# Altium PCB PCIEx1toMXM3.0.PcbDoc
Units mm, origin at the board's own origin, x right, y up, seen from the top; angles counter-clockwise.
Board outline 100 x 97.65 mm, 2 copper layers (F.Cu, B.Cu); 34 components, 205 nets, 419 pads, 135 vias.
Unrouted connection lines stored in the file: 17.
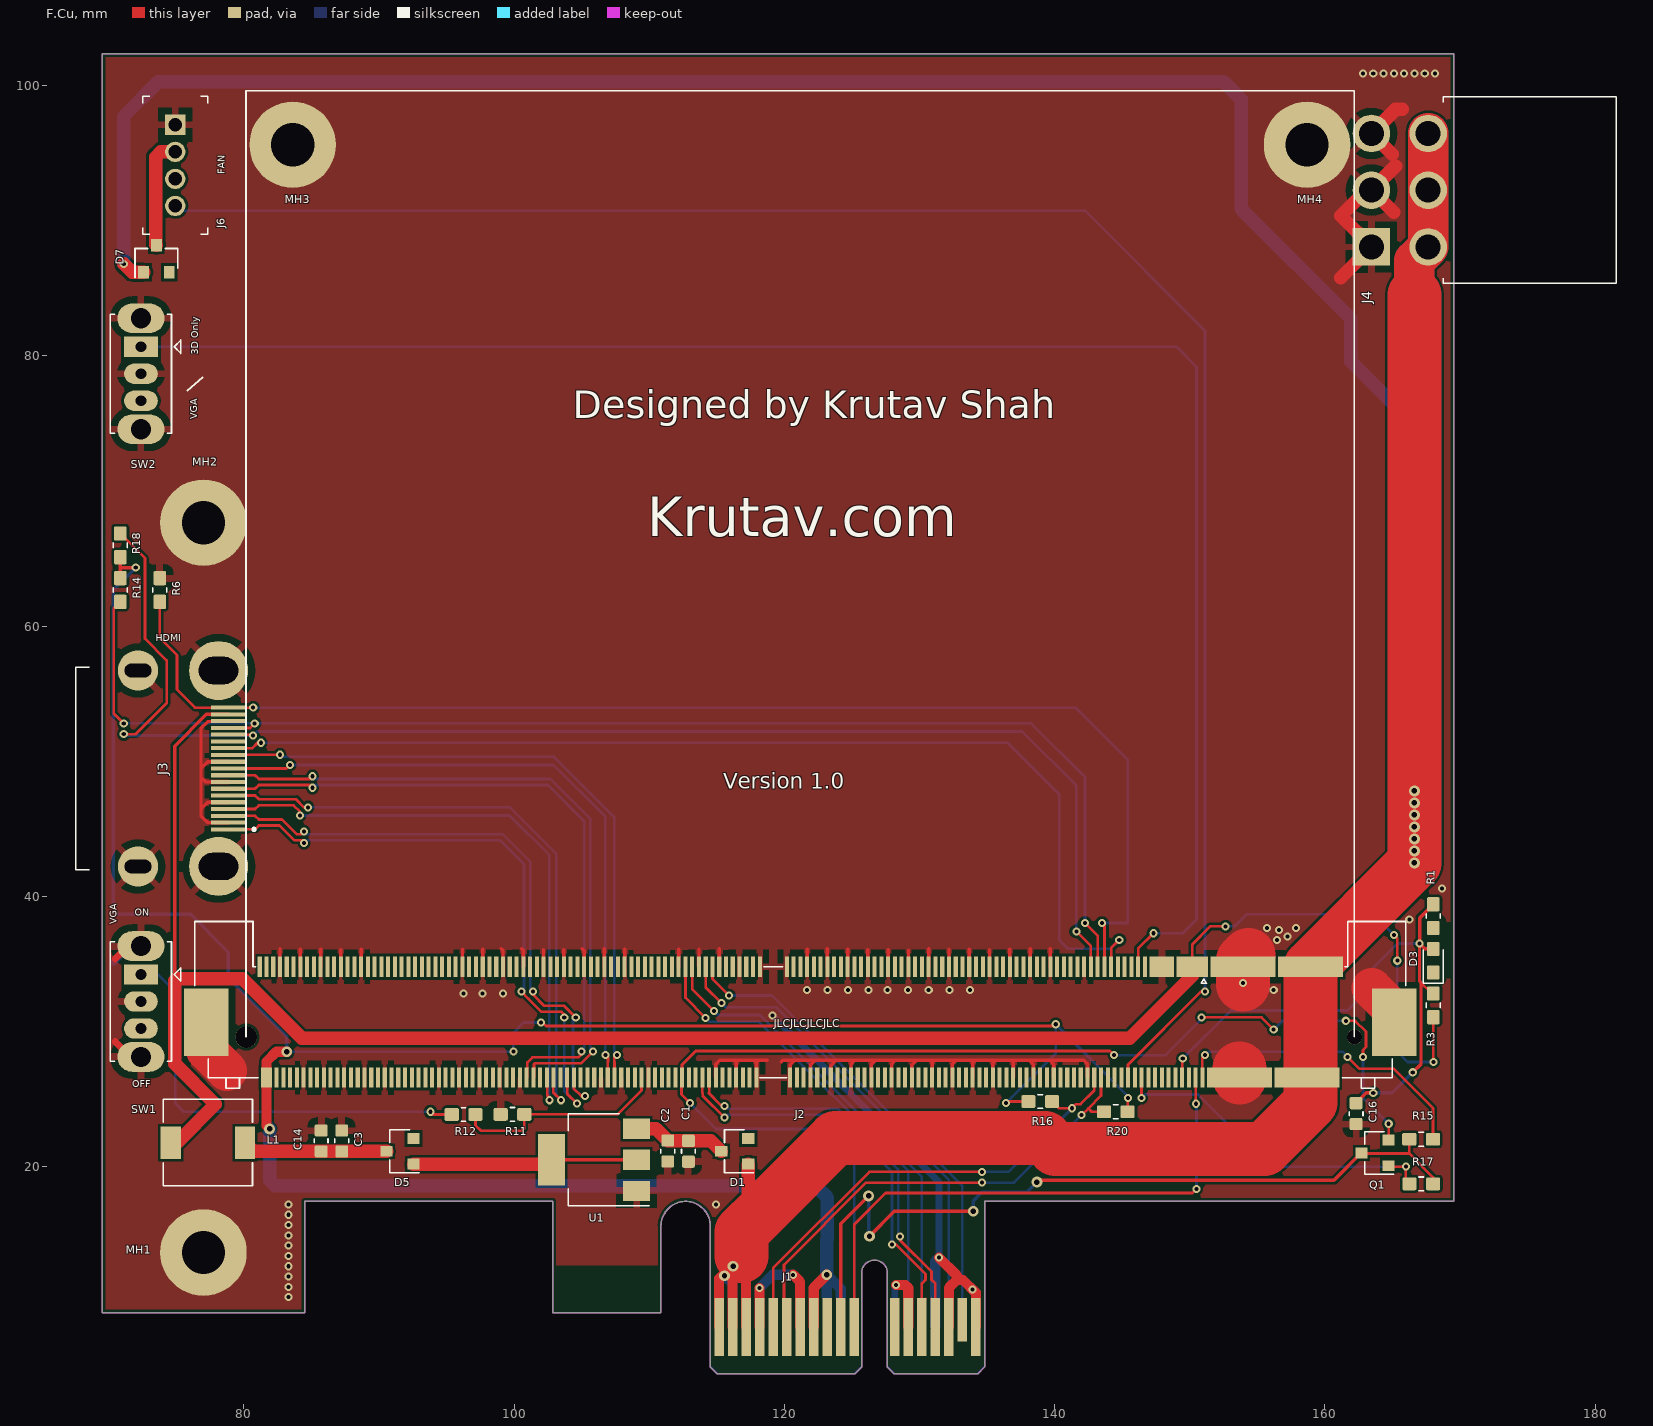
[diagram p0: F.Cu view]
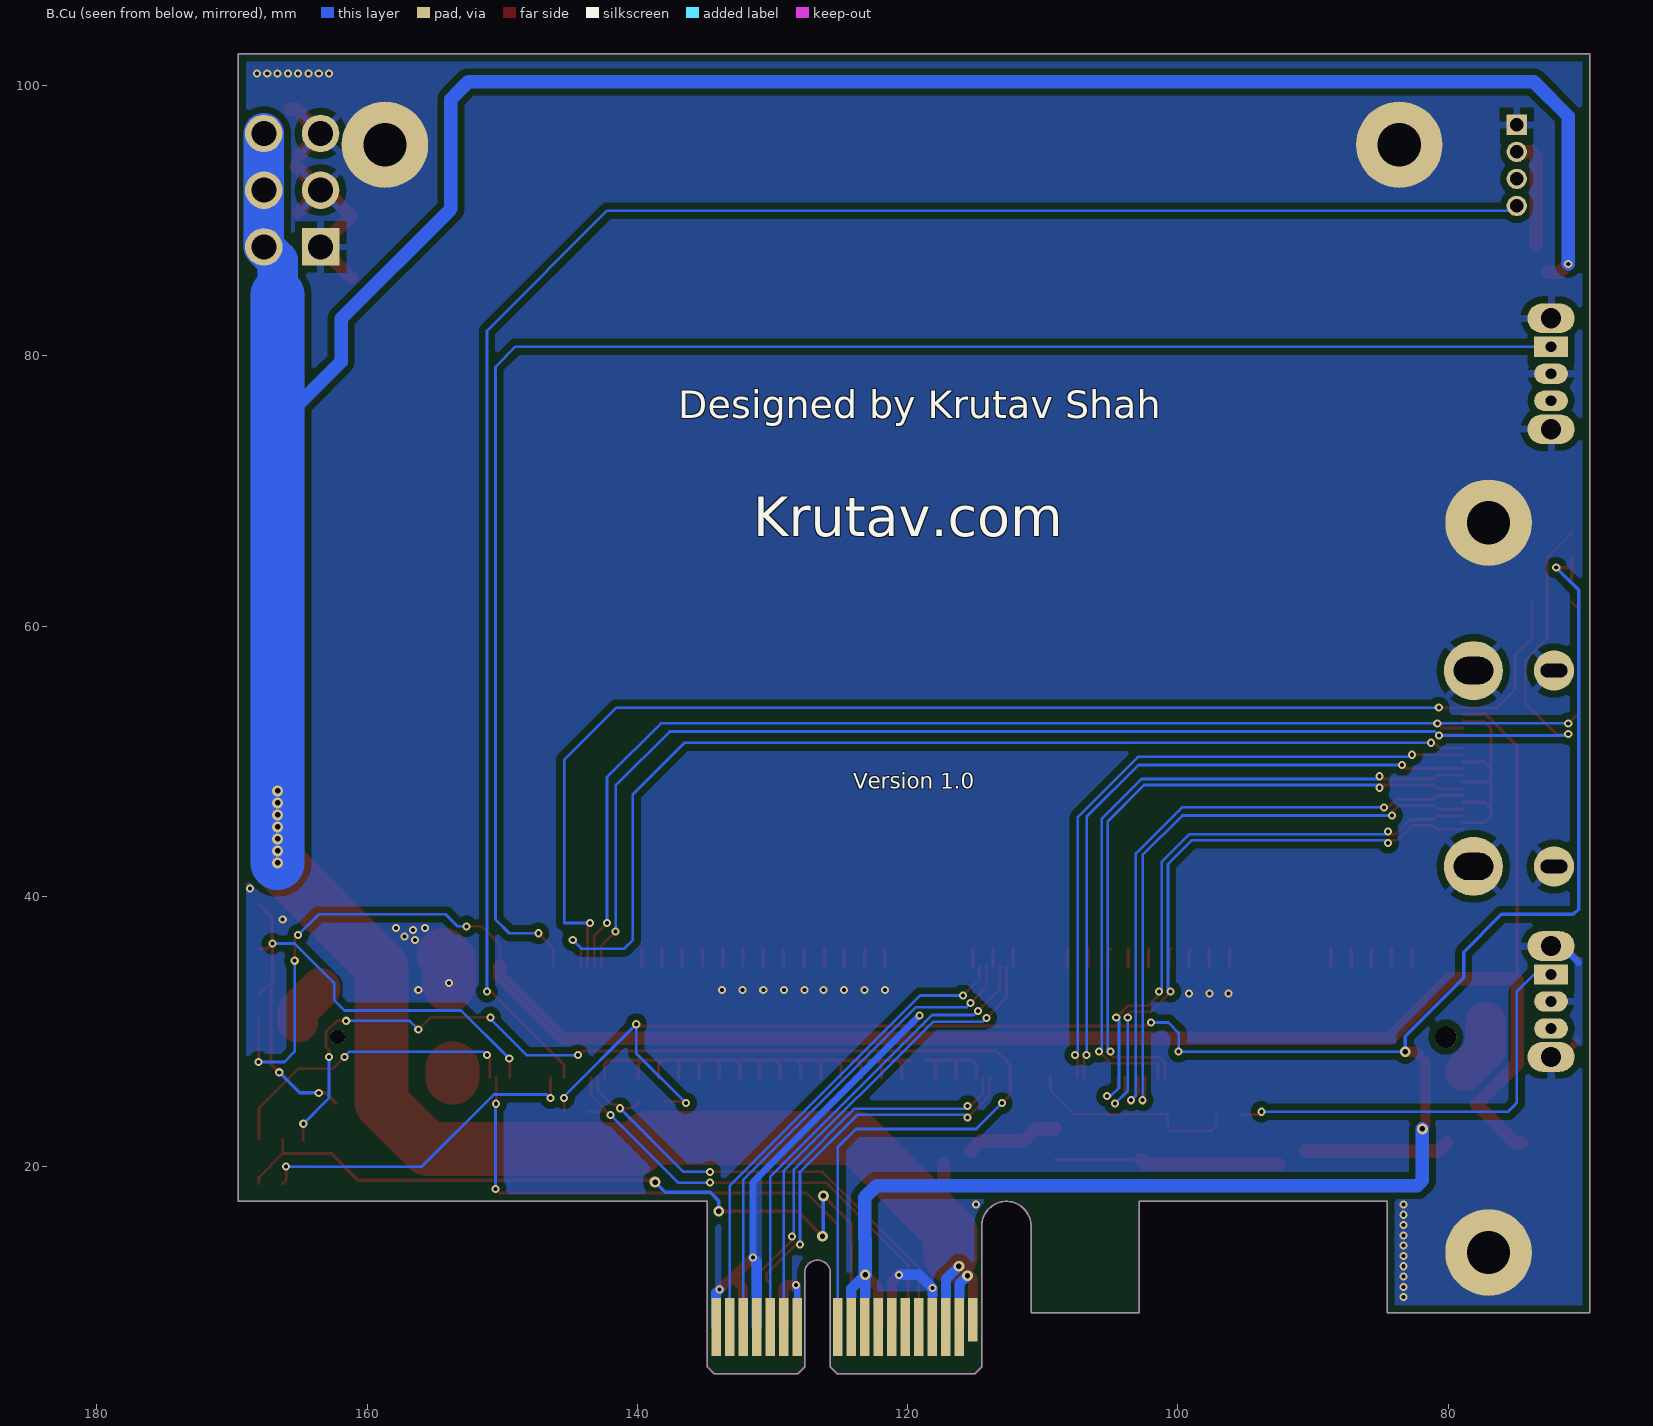
[diagram p1: B.Cu view, seen from below]

## Layer stack, top to bottom
F.Mask: solder mask 0.0102, Solder Resist, Dk 3.5
F.Cu: signal copper 0.0356
Dielectric 1: dielectric 0.32, FR-4, Dk 4.8
B.Cu: signal copper 0.0356
B.Mask: solder mask 0.0102, Solder Resist, Dk 3.5

## Board outline
169.52,17.428 169.52,102.328 69.52,102.328 69.52,9.178 84.52,9.178 84.52,17.428 102.87,17.428 102.87,9.178 110.87,9.178 110.87,15.603 cw(c112.695,15.603) 114.52,15.603 114.521,13.077 114.521,5.177 115.021,4.677 125.221,4.677 125.721,5.177 125.721,12.127 cw(c126.671,12.127) 127.621,12.127 127.621,5.177 128.121,4.677 134.321,4.677 134.821,5.177 134.821,13.077 134.822,17.428 169.52,17.428

## Design rules (kind name [scope] priority, off if disabled: settings)
Clearance "Clearence 0.508_Polygon" [InNamedPolygon('B.Cu-GND')] p1: gap=0.508 ignorepadtopadclearanceinfootprint=FALSE
Clearance "Clearence 0.2_NetClass" [InNetClass('Default')] p2: gap=0.2 ignorepadtopadclearanceinfootprint=FALSE
Clearance "Clearence 0.1_Polygon" [InNamedPolygon('F.Cu-GND')] p3: gap=0.1 ignorepadtopadclearanceinfootprint=FALSE
HoleSize "Hole Size (Default)" [All] p1: absolutevalues=TRUE maxlimit=10 minlimit=0 maxpercent=80.000 minpercent=20.000
MinimumSolderMaskSliver [All] p1: minsoldermaskwidth=0
PolygonConnect Polygon_F.Cu-GND_ConnectDirect [IsNamedPolygon('F.Cu-GND') vs IsVia] p1: connectstyle=Direct reliefconductorwidth=0.254 reliefentries=4 polygonreliefangle="90 Angle" airgapwidth=0.254
PolygonConnect Polygon_F.Cu-GND_ConnectRelief45 [IsNamedPolygon('F.Cu-GND') vs (IsThruPin or IsSMTPin) and (PadShape_AllLayers = 'Round')] p2: connectstyle=Relief reliefconductorwidth=0.508 reliefentries=4 polygonreliefangle="45 Angle" airgapwidth=0.508
PolygonConnect Polygon_F.Cu-GND_ConnectRelief90 [IsNamedPolygon('F.Cu-GND') vs (IsThruPin or IsSMTPin) and (PadShape_AllLayers <> 'Round')] p3: connectstyle=Relief reliefconductorwidth=0.508 reliefentries=4 polygonreliefangle="90 Angle" airgapwidth=0.508
PolygonConnect Polygon_B.Cu-GND_ConnectDirect [IsNamedPolygon('B.Cu-GND') vs IsVia] p4: connectstyle=Direct reliefconductorwidth=0.254 reliefentries=4 polygonreliefangle="90 Angle" airgapwidth=0.254
PolygonConnect Polygon_B.Cu-GND_ConnectRelief45 [IsNamedPolygon('B.Cu-GND') vs (IsThruPin or IsSMTPin) and (PadShape_AllLayers = 'Round')] p5: connectstyle=Relief reliefconductorwidth=0.508 reliefentries=4 polygonreliefangle="45 Angle" airgapwidth=0.508
PolygonConnect Polygon_B.Cu-GND_ConnectRelief90 [IsNamedPolygon('B.Cu-GND') vs (IsThruPin or IsSMTPin) and (PadShape_AllLayers <> 'Round')] p6: connectstyle=Relief reliefconductorwidth=0.508 reliefentries=4 polygonreliefangle="90 Angle" airgapwidth=0.508
RoutingVias [All] p1: holewidth=0.711 width=1.27 viastyle="Through Hole" minholewidth=0.711 minwidth=1.27 maxholewidth=0.711 maxwidth=1.27
SilkToSilkClearance [All] p1: silktosilkclearance=0
SilkToSolderMaskClearance [IsPad] p1: minsilkscreentomaskgap=0 clearancetoexposedcopper=TRUE
SolderMaskExpansion [All] p1: expansion=0.102 istentingtop=FALSE
Width [All] p1: maxlimit=10 minlimit=0.2 preferedwidth=0.25 minimp=50.000000 maximp=50.000000 favimp=50.000000
26 further rules are at their usual default settings.

## Classes and differential pairs
net class Default: +3.3VA +3V3 +5V +12V CEC CK_N CK_P D0_N D0_P D1_N D1_P D2_N D2_P DP_A_HPD DP_D_AUX DP_D_AUX# DP_D_HPD DP_D_L3 DP_D_L3# Enable GND Net-(C1-Pad1) Net-(C4-Pad1) Net-(C5-Pad1) Net-(C6-Pad1) Net-(C7-Pad1) Net-(C8-Pad1) Net-(C9-Pad1) Net-(C10-Pad1) Net-(C11-Pad1) Net-(C12-Pad1) Net-(C13-Pad1) Net-(C14-Pad2) Net-(D5-Pad2) Net-(D7-Pad1) Net-(FB1-Pad1) Net-(FB2-Pad1) Net-(FB3-Pad1) Net-(FB4-Pad1) Net-(FB5-Pad2) Net-(J1-PadA1) Net-(J1-PadA5) Net-(J1-PadA6) Net-(J1-PadA7) Net-(J1-PadA8) Net-(J1-PadB9) Net-(J1-PadB12) Net-(J2-Pad6) Net-(J2-Pad10) Net-(J2-Pad12) Net-(J2-Pad14) Net-(J2-Pad16) Net-(J2-Pad18) Net-(J2-Pad19) Net-(J2-Pad22) Net-(J2-Pad23) Net-(J2-Pad25) Net-(J2-Pad26) Net-(J2-Pad27) Net-(J2-Pad28) Net-(J2-Pad30) Net-(J2-Pad38) Net-(J2-Pad39) Net-(J2-Pad40) Net-(J2-Pad41) Net-(J2-Pad42) Net-(J2-Pad43) Net-(J2-Pad44) Net-(J2-Pad45) Net-(J2-Pad154) Net-(J2-Pad158) Net-(J2-Pad159) Net-(J2-Pad160) Net-(J2-Pad161) Net-(J2-Pad163) Net-(J2-Pad165) Net-(J2-Pad167) Net-(J2-Pad169) Net-(J2-Pad171) Net-(J2-Pad175) Net-(J2-Pad177) Net-(J2-Pad181) Net-(J2-Pad182) Net-(J2-Pad183) Net-(J2-Pad184) Net-(J2-Pad187) Net-(J2-Pad189) Net-(J2-Pad193) Net-(J2-Pad195) Net-(J2-Pad199) Net-(J2-Pad201) Net-(J2-Pad205) Net-(J2-Pad207) Net-(J2-Pad211) Net-(J2-Pad213) Net-(J2-Pad217) Net-(J2-Pad219) Net-(J2-Pad223) Net-(J2-Pad225) Net-(J2-Pad227) Net-(J2-Pad229) Net-(J2-Pad231) Net-(J2-Pad233) Net-(J2-Pad234) Net-(J2-Pad235) Net-(J2-Pad237) Net-(J2-Pad238) Net-(J2-Pad239) Net-(J2-Pad240) Net-(J2-Pad241) Net-(J2-Pad242) Net-(J2-Pad243) Net-(J2-Pad245) Net-(J2-Pad246) Net-(J2-Pad247) Net-(J2-Pad248) Net-(J2-Pad249) Net-(J2-Pad252) Net-(J2-Pad254) Net-(J2-Pad258) Net-(J2-Pad260) Net-(J2-Pad264) Net-(J2-Pad266) Net-(J2-Pad270) Net-(J2-Pad272) Net-(J2-Pad274) Net-(J2-Pad281) Net-(J3-Pad14) PER0_N PER0_P PER1_N PER1_P PER2_N PER2_P PER3_N PER3_P PER4_N PER4_P PER5_N PER5_P PER6_N PER6_P PER7_N PER7_P PER8_N PER8_P PER9_N PER9_P PER10_N PER10_P PER11_N PER11_P PER12_N PER12_P PER13_N PER13_P PER14_N PER14_P PER15_N PER15_P PERST PET0_N PET0_P PET1_N PET1_P PET2_N PET2_P PET3_N PET3_P PET4_N PET4_P PET5_N PET5_P PET6_N PET6_P PET7_N PET7_P PET8_N PET8_P PET9_N PET9_P PET10_N PET10_P PET11_N PET11_P PET12_N PET12_P PET13_N PET13_P PET14_N PET14_P PET15_N PET15_P PRSNT_R# REFCLK_N REFCLK_P SMCLK SMDAT TH_OVERT# TH_PWM TMDS_HPD TMDS_SCL TMDS_SDA VGA_DISABLE# WAKE

## Components (designator, comment, footprint, x,y, rotation, side; value= is the part's Value field where it differs from the comment)
C1 "C_0603_1608Metric" C_0603_1608Metric 112.903,21.137 r270 top
C2 "C_0603_1608Metric" C_0603_1608Metric 111.379,21.15 r270 top
C3 "C_0603_1608Metric" C_0603_1608Metric 87.249,21.899 r270 top
C14 "C_0603_1608Metric" C_0603_1608Metric 85.725,21.899 r270 top
C16 "C_0603_1608Metric" C_0603_1608Metric 162.306,23.918 r270 top
D1 "PMEG4010ET" D_SOT-23_ANK 116.332,21.137 r180 top
D3 "LED_0603_1608Metric_Pad1.05x0.95mm_HandSolder" LED_0603_1608Metric_Pad1.05x0.95mm_HandSolder 168.021,35.234 r90 top
D5 "PMEG4010ET" D_SOT-23_ANK 91.567,21.137 r180 top
D7 "PMEG4010ET" D_SOT-23_ANK 73.533,87.177 r90 top
J1 "Bus_PCI_Express_x1" BUS_PCIexpress_x1 115.171,8.127 r0 top
J2 "MXM3.0" JAE_MM70-314-310B1 121.183,30.688 r180 top
J3 "208658-1081" 2086581081 73.66,49.458 r270 top
J4 "45558-0003" 455580003 167.64,96.448 r270 top
J6 "PinHeader_1x4_P2mm_Drill1mm" PinHeader_1x4_P2mm_Drill1mm 74.93,97.083 r270 top
L1 "L_6.3x6.3_H3" L_6.3x6.3_H3 77.343,21.772 r0 top
MH1 "MountingHole_3.2mm_M3_Pad" MountingHole_3.2mm_M3_Pad 77.02,13.644 r0 top
MH2 "MountingHole_3.2mm_M3_Pad" MountingHole_3.2mm_M3_Pad 77.02,67.644 r0 top
MH3 "MountingHole_3.2mm_M3_Pad" MountingHole_3.2mm_M3_Pad 83.617,95.61 r90 top
MH4 "MountingHole_3.2mm_M3_Pad" MountingHole_3.2mm_M3_Pad 158.674,95.61 r90 top
Q1 "BC848" SOT-23 163.703,21.01 r180 top
R1 "R_0603_1608Metric_Pad1.05x0.95mm_HandSolder" R_0603_1608Metric_Pad1.05x0.95mm_HandSolder 168.021,38.536 r90 top
R3 "R_0603_1608Metric_Pad1.05x0.95mm_HandSolder" R_0603_1608Metric_Pad1.05x0.95mm_HandSolder 168.021,31.932 r90 top
R6 "R_0603_1608Metric_Pad1.05x0.95mm_HandSolder" R_0603_1608Metric_Pad1.05x0.95mm_HandSolder 73.787,62.666 r270 top
R11 "R_0603_1608Metric_Pad1.05x0.95mm_HandSolder" R_0603_1608Metric_Pad1.05x0.95mm_HandSolder 99.885,23.868 r0 top
R12 "R_0603_1608Metric_Pad1.05x0.95mm_HandSolder" R_0603_1608Metric_Pad1.05x0.95mm_HandSolder 96.266,23.855 r180 top
R14 "R_0603_1608Metric_Pad1.05x0.95mm_HandSolder" R_0603_1608Metric_Pad1.05x0.95mm_HandSolder 70.866,62.666 r270 top
R15 "R_0603_1608Metric_Pad1.05x0.95mm_HandSolder" R_0603_1608Metric_Pad1.05x0.95mm_HandSolder 167.118,22.026 r180 top
R16 "R_0603_1608Metric_Pad1.05x0.95mm_HandSolder" R_0603_1608Metric_Pad1.05x0.95mm_HandSolder 138.938,24.82 r0 top
R17 "R_0603_1608Metric_Pad1.05x0.95mm_HandSolder" R_0603_1608Metric_Pad1.05x0.95mm_HandSolder 167.132,18.724 r0 top
R18 "R_0603_1608Metric_Pad1.05x0.95mm_HandSolder" R_0603_1608Metric_Pad1.05x0.95mm_HandSolder 70.866,65.968 r270 top
R20 "R_0603_1608Metric_Pad1.05x0.95mm_HandSolder" R_0603_1608Metric_Pad1.05x0.95mm_HandSolder 144.526,24.058 r0 top
SW1 "SW_Slide_1P2T_CK_OS102011MS2Q" SW_Slide_1P2T_CK_OS102011MS2Q#1 72.39,34.218 r270 top
SW2 "SW_Slide_1P2T_CK_OS102011MS2Q" SW_Slide_1P2T_CK_OS102011MS2Q#2 72.39,80.668 r270 top
U1 "AMS1117-5.0" SOT-223-3_TabPin2 105.918,20.502 r180 top

## Footprints (in the part's own frame and the unit in brackets; to place one, negate y for a bottom-side part, rotate by r counter-clockwise, add the part's x,y. Pads: shape width x height; smd on the part's side, far side on the other; paste and mask are expansions set on the pad)
455580003 [mm]
  round 2.775 hole 1.85 paste-2.775 mask+0.05: 1(0,0) 2(4.2,0) 3(8.4,0) 4(0,-4.2) 5(4.2,-4.2)
  rect 2.775x2.775 hole 1.85 paste-2.775 mask+0.05: 6(8.4,-4.2)
  oval 3.05x0 hole 3.05 paste-3.05 mask+0.05: MH1(0,7.3) MH2(8.4,7.3)
  silkscreen extent -2.7,1.1 11.1,13.9
2086581081 [mm]
  rect 0.3x2.6 smd mask+0.05: 1(4.5,5.235) 2(4,5.235) 3(3.5,5.235) 4(3,5.235) 5(2.5,5.235) 6(2,5.235) 7(1.5,5.235) 8(1,5.235) 9(0.5,5.235) 10(0,5.235) 11(-0.5,5.235) 12(-1,5.235) 13(-1.5,5.235) 14(-2,5.235) 15(-2.5,5.235) 16(-3,5.235) 17(-3.5,5.235) 18(-4,5.235) 19(-4.5,5.235)
  round 4.365 hole 2.91 slot 2 at 0 deg paste-4.365 mask+0.05: MH1(-7.25,4.475) MH2(7.25,4.475)
  round 2.985 hole 1.99 slot 1 at 0 deg paste-2.985 mask-2.985: MH3(-7.25,-1.485)
  round 2.985 hole 1.99 slot 1 at 0 deg paste-2.985 mask+0.05: MH4(7.25,-1.485)
  silkscreen extent -7.5,-6.07 7.5,7.2
BUS_PCIexpress_x1 [mm]
  rect 0.7x3.2 smd far side paste-3.2 mask+0.05: A1(0,0.55)
  rect 0.7x4.3 smd far side paste-4.3 mask+0.05: A2(1,0) A3(2,0) A4(3,0) A5(4,0) A6(5,0) A7(6,0) A8(7,0) A9(8,0) A10(9,0) A11(10,0) A12(13,0) A13(14,0) A14(15,0) A15(16,0) A16(17,0) A17(18,0) A18(19,0)
  rect 0.7x4.3 smd paste-4.3 mask+0.05: B1(0,0) B2(1,0) B3(2,0) B4(3,0) B5(4,0) B6(5,0) B7(6,0) B8(7,0) B9(8,0) B10(9,0) B11(10,0) B12(13,0) B13(14,0) B14(15,0) B15(16,0) B16(17,0) B18(19,0)
  rect 0.7x3.2 smd paste-3.2 mask+0.05: B17(18,0.55)
C_0603_1608Metric [mm]
  rrect25% 0.9x0.95 smd mask+0.05: 1(-0.775,0) 2(0.775,0)
  silkscreen extent -0.14,-0.51 0.14,0.51
D_SOT-23_ANK [mm]
  rect 0.9x0.8 smd mask+0.05: 1(1,0) 2(-1,0.95) Un1(-1,-0.95)
  silkscreen extent -1.4,-1.58 0.76,1.58
JAE_MM70-314-310B1 [mm]
  rect 2.3x1.5 smd mask+0.05: 1(-29,-4.1) 3(-29,-4.1) 5(-29,-4.1) 7(-29,-4.1) 9(-29,-4.1)
  rect 0.3x1.5 smd mask+0.05: 2(-29.75,4.1) 4(-29.25,4.1) 6(-28.75,4.1) 8(-28.25,4.1) 10(-27.75,4.1) 12(-27.25,4.1) 14(-26.75,4.1) 16(-26.25,4.1) 18(-25.75,4.1) 19(-25.5,-4.1) 20(-25.25,4.1) 21(-25,-4.1) 22(-24.75,4.1) 23(-24.5,-4.1) 24(-24.25,4.1) 25(-24,-4.1) 26(-23.75,4.1) 27(-23.5,-4.1) 28(-23.25,4.1) 29(-23,-4.1) 30(-22.75,4.1) 31(-22.5,-4.1) 32(-22.25,4.1) 33(-22,-4.1) 34(-21.75,4.1) 35(-21.5,-4.1) 36(-21.25,4.1) 37(-21,-4.1) 38(-20.75,4.1) 39(-20.5,-4.1) 40(-20.25,4.1) 41(-20,-4.1) 42(-19.75,4.1) 43(-19.5,-4.1) 44(-19.25,4.1) 45(-19,-4.1) 46(-18.75,4.1) 47(-18.5,-4.1) 48(-18.25,4.1) 49(-18,-4.1) 50(-17.75,4.1) 51(-17.5,-4.1) 52(-17.25,4.1) 53(-17,-4.1) 54(-16.75,4.1) 55(-16.5,-4.1) 56(-16.25,4.1) 57(-16,-4.1) 58(-15.75,4.1) 59(-15.5,-4.1) 60(-15.25,4.1) 61(-15,-4.1) 62(-14.75,4.1) 63(-14.5,-4.1) 64(-14.25,4.1) 65(-14,-4.1) 66(-13.75,4.1) 67(-13.5,-4.1) 68(-13.25,4.1) 69(-13,-4.1) 70(-12.75,4.1) 71(-12.5,-4.1) 72(-12.25,4.1) 73(-12,-4.1) 74(-11.75,4.1) 75(-11.5,-4.1) 76(-11.25,4.1) 77(-11,-4.1) 78(-10.75,4.1) 79(-10.5,-4.1) 80(-10.25,4.1) 81(-10,-4.1) 82(-9.75,4.1) 83(-9.5,-4.1) 84(-9.25,4.1) 85(-9,-4.1) 86(-8.75,4.1) 87(-8.5,-4.1) 88(-8.25,4.1) 89(-8,-4.1) 90(-7.75,4.1) 91(-7.5,-4.1) 92(-7.25,4.1) 93(-7,-4.1) 94(-6.75,4.1) 95(-6.5,-4.1) 96(-6.25,4.1) 97(-6,-4.1) 98(-5.75,4.1) 99(-5.5,-4.1) 100(-5.25,4.1) 101(-5,-4.1) 102(-4.75,4.1) 103(-4.5,-4.1) 104(-4.25,4.1) 105(-4,-4.1) 106(-3.75,4.1) 107(-3.5,-4.1) 108(-3.25,4.1) 109(-3,-4.1) 110(-2.75,4.1) 111(-2.5,-4.1) 112(-2.25,4.1) 113(-2,-4.1) 114(-1.75,4.1) 115(-1.5,-4.1) 116(-1.25,4.1) 117(-1,-4.1) 118(-0.75,4.1) 119(-0.5,-4.1) 120(-0.25,4.1) 121(0,-4.1) 122(0.25,4.1) 123(0.5,-4.1) 124(0.75,4.1) 125(1,-4.1) 133(3,-4.1) 134(3.25,4.1) 135(3.5,-4.1) 136(3.75,4.1) 137(4,-4.1) 138(4.25,4.1) 139(4.5,-4.1) 140(4.75,4.1) 141(5,-4.1) 142(5.25,4.1) 143(5.5,-4.1) 144(5.75,4.1) 145(6,-4.1) 146(6.25,4.1) 147(6.5,-4.1) 148(6.75,4.1) 149(7,-4.1) 150(7.25,4.1) 151(7.5,-4.1) 152(7.75,4.1) 153(8,-4.1) 154(8.25,4.1) 155(8.5,-4.1) 156(8.75,4.1) 157(9,-4.1) 158(9.25,4.1) 159(9.5,-4.1) 160(9.75,4.1) 161(10,-4.1) 162(10.25,4.1) 163(10.5,-4.1) 164(10.75,4.1) 165(11,-4.1) 166(11.25,4.1) 167(11.5,-4.1) 168(11.75,4.1) 169(12,-4.1) 170(12.25,4.1) 171(12.5,-4.1) 172(12.75,4.1) 173(13,-4.1) 174(13.25,4.1) 175(13.5,-4.1) 176(13.75,4.1) 177(14,-4.1) 178(14.25,4.1) 179(14.5,-4.1) 180(14.75,4.1) 181(15,-4.1) 182(15.25,4.1) 183(15.5,-4.1) 184(15.75,4.1) 185(16,-4.1) 186(16.25,4.1) 187(16.5,-4.1) 188(16.75,4.1) 189(17,-4.1) 190(17.25,4.1) 191(17.5,-4.1) 192(17.75,4.1) 193(18,-4.1) 194(18.25,4.1) 195(18.5,-4.1) 196(18.75,4.1) 197(19,-4.1) 198(19.25,4.1) 199(19.5,-4.1) 200(19.75,4.1) 201(20,-4.1) 202(20.25,4.1) 203(20.5,-4.1) 204(20.75,4.1) 205(21,-4.1) 206(21.25,4.1) 207(21.5,-4.1) 208(21.75,4.1) 209(22,-4.1) 210(22.25,4.1) 211(22.5,-4.1) 212(22.75,4.1) 213(23,-4.1) 214(23.25,4.1) 215(23.5,-4.1) 216(23.75,4.1) 217(24,-4.1) 218(24.25,4.1) 219(24.5,-4.1) 220(24.75,4.1) 221(25,-4.1) 222(25.25,4.1) 223(25.5,-4.1) 224(25.75,4.1) 225(26,-4.1) 226(26.25,4.1) 227(26.5,-4.1) 228(26.75,4.1) 229(27,-4.1) 230(27.25,4.1) 231(27.5,-4.1) 232(27.75,4.1) 233(28,-4.1) 234(28.25,4.1) 235(28.5,-4.1) 236(28.75,4.1) 237(29,-4.1) 238(29.25,4.1) 239(29.5,-4.1) 240(29.75,4.1) 241(30,-4.1) 242(30.25,4.1) 243(30.5,-4.1) 244(30.75,4.1) 245(31,-4.1) 246(31.25,4.1) 247(31.5,-4.1) 248(31.75,4.1) 249(32,-4.1) 250(32.25,4.1) 251(32.5,-4.1) 252(32.75,4.1) 253(33,-4.1) 254(33.25,4.1) 255(33.5,-4.1) 256(33.75,4.1) 257(34,-4.1) 258(34.25,4.1) 259(34.5,-4.1) 260(34.75,4.1) 261(35,-4.1) 262(35.25,4.1) 263(35.5,-4.1) 264(35.75,4.1) 265(36,-4.1) 266(36.25,4.1) 267(36.5,-4.1) 268(36.75,4.1) 269(37,-4.1) 270(37.25,4.1) 271(37.5,-4.1) 272(37.75,4.1) 273(38,-4.1) 274(38.25,4.1) 275(38.5,-4.1) 276(38.75,4.1) 277(39,-4.1) 279(39.5,-4.1) 281(40,-4.1)
  rect 1.8x1.5 smd mask+0.05: 11(-26.75,-4.1) 13(-26.75,-4.1) 15(-26.75,-4.1) 17(-26.75,-4.1)
  rect 0.8x1.5 smd mask+0.05: 278(39.5,4.1) 280(39.5,4.1)
  rect 4.8x1.5 smd mask+0.05: E1(-37.75,-4.1) E2(-37.5,4.1) E3(-32.75,-4.1) E4(-32.5,4.1)
  rect 3.3x5 smd mask+0.05: MP(-43.95,0) MP(43.95,0)
  round 1.1 hole 1.1 paste-1.1 mask+0.05: Un1(-41,1.1)
  round 1.6 hole 1.6 paste-1.6 mask+0.05: Un2(41,1.1)
  silkscreen extent -44.8,-7.45 44.8,4.9
L_6.3x6.3_H3 [mm]
  rect 1.5x2.4 smd mask+0.05: 1(2.75,0) 2(-2.75,0)
  silkscreen extent -3.3,-3.2 3.3,3.2
LED_0603_1608Metric_Pad1.05x0.95mm_HandSolder [mm]
  rrect25% 1.05x0.95 smd mask+0.05: 1(-0.875,0) 2(0.875,0)
  silkscreen extent -1.66,-0.73 0.8,0.73
MountingHole_3.2mm_M3_Pad [mm]
  round 6.4 hole 3.2 paste-6.4 mask+0.05: 1(0,0)
PinHeader_1x4_P2mm_Drill1mm [mm]
  rect 1.5x1.5 hole 1 paste-1.5 mask+0.05: 1(0,0)
  round 1.5 hole 1 paste-1.5 mask+0.05: 2(2,0) 3(4,0) 4(6,0)
  silkscreen extent -2.1,-2.4 8.1,2.4
R_0603_1608Metric_Pad1.05x0.95mm_HandSolder [mm]
  rrect25% 1.05x0.95 smd mask+0.05: 1(-0.875,0) 2(0.875,0)
  silkscreen extent -0.17,-0.51 0.17,0.51
SOT-23 [mm]
  rect 0.9x0.8 smd mask+0.05: 1(-1,0.95) 2(-1,-0.95) 3(1,0)
  silkscreen extent -1.4,-1.58 0.76,1.58
SOT-223-3_TabPin2 [mm]
  rect 2x1.5 smd mask+0.05: 1(-3.15,2.3) 2(-3.15,0) 3(-3.15,-2.3)
  rect 2x3.8 smd mask+0.05: 2(3.15,0)
  silkscreen extent -4.1,-3.41 1.91,3.41
SW_Slide_1P2T_CK_OS102011MS2Q#1 [mm]
  rect 1.5x2.5 hole 0.8 paste-2.5 mask+0.05: 1(0,0)
  rrect100% 1.5x2.5 hole 0.8 paste-2.5 mask+0.05: 2(2,0) 3(4,0)
  rrect100% 2.2x3.5 hole 1.5 paste-3.5 mask+0.05: Un1(6.1,0) Un2(-2.1,0)
  silkscreen extent -2.41,-2.26 6.41,2.96
SW_Slide_1P2T_CK_OS102011MS2Q#2 [mm]
  rect 1.5x2.5 hole 0.8 paste-2.5 mask+0.05: 1(0,0)
  rrect100% 1.5x2.5 hole 0.8 paste-2.5 mask+0.05: 2(2,0) 3(4,0)
  rrect100% 2.2x3.5 hole 1.5 paste-3.5 mask+0.05: Un1(-2.1,0) Un2(6.1,0)
  silkscreen extent -2.41,-2.26 6.41,2.96

## Part data
C1 C2 C3 C14 C16: "Capacitor SMD 0603 (1608 Metric), square (rectangular) end terminal, IPC_7351 nominal, (Body size source: IPC-SM-782 page 76, https://www.pcb-3d.com/wordpress/wp-content/uploads/ipc-sm-782a_amendment_1_and_2.pdf), generated with kicad-footprint-generator"
D1 D5 D7: library part D_SOT-23_ANK, "SOT-23, Single Diode"
D3: "LED SMD 0603 (1608 Metric), square (rectangular) end terminal, IPC_7351 nominal, (Body size source: http://www.tortai-tech.com/upload/download/2011102023233369053.pdf), generated with kicad-footprint-generator"
J1: library part BUS_PCIexpress_x1, "PCIexpress Bus Edge Connector x1 http://www.ritrontek.com/uploadfile/2016/1026/20161026105231124.pdf#page=70"
J2: library part JAE_MM70-314-310B1, "http://www.heilind.com/marketing/documents/jae/JAE_MM70.pdf"
J3: library part 2086581081, "208658-1081-4"
J4: library part 455580003, "45558-0003-3"
J6: "http://www.jst-mfg.com/product/pdf/eng/ePH.pdf"
L1: "Choke, SMD, 6.3x6.3mm 3mm height"
MH1 MH2 MH3 MH4: "Mounting Hole 3.2mm, M3"
Q1: library part SOT-23, "SOT-23, Standard"
R1 R3 R6 R11 R12 R14 R15 R16 R17 R18 R20: "Resistor SMD 0603 (1608 Metric), square (rectangular) end terminal, IPC_7351 nominal with elongated pad for handsoldering. (Body size source: http://www.tortai-tech.com/upload/download/2011102023233369053.pdf), generated with kicad-footprint-generator"
SW1 SW2: "CuK miniature slide switch, OS series, SPDT, https://www.ckswitches.com/media/1428/os.pdf"
U1: library part SOT-223-3_TabPin2, "module CMS SOT223 4 pins"

## Via types
v1: diameter 0.6, hole 0.3, F.Cu to B.Cu, tented both sides, 119 vias
v2: diameter 0.8, hole 0.4, F.Cu to B.Cu, tented both sides, 16 vias

## Nets (pads, with @x,y where several pads share a name; then routed paths per layer and width w, separated by ;. In a path a pad name is that pad's centre, name@x,y a point inside that pad or via, vN(x,y) a via of type N, cw(c..) or ccw(c..) an arc to the next point about the centre after c; other vN are vias at no path point)
+3.3VA: J1.B10 Q1.3 R15.2 R17.2 | length 60.7
  F.Cu w0.2: Q1.3 162.75,20.963 166.243,20.963 ; R15.2 166.243,20.963 ; R17.2 168.007,19.199 166.243,20.963
  F.Cu w0.25: J1.B10 124.171,15.769 v2(126.238,17.835) ; v2@126.238,14.787 v2(126.301,14.851) 128.143,16.692 v2(133.985,16.692) ; v2(138.684,18.851) 138.812,18.979 160.672,18.979 Q1.3
  B.Cu w0.25: v2(126.238,17.835) 126.238,14.914 v2(126.301,14.851) ; v2(133.985,16.692) 133.985,17.454 134.62,18.089 137.922,18.089 v2(138.684,18.851)
+3V3: J1.A9 J1.A10 J1.B8 J2.278 J2.280 R14.1 R16.1 R18.2 R20.2 | length 190.4
  F.Cu w0.2: v1(101.981,30.662) 102.108,30.662 102.362,30.408 108.712,30.408 112.395,30.408 139.954,30.408 v1(140.081,30.535) ; v1(136.398,24.693) 136.525,24.82 R16.1 ; R20.2 145.401,25.06 v1(145.415,25.074)
  F.Cu w0.25: R14.1 70.866,64.317 ; R18.2 70.866,64.317 ; v1(72.009,64.317) 71.501,64.317 70.866,64.317
  F.Cu w0.75: v2(81.915,22.788) 81.683,23.02 J2.278 81.683,27.773 82.414,28.503 v2(83.185,28.503) ; J1.B8 122.171,11.027 v2(123.137,11.993)
  B.Cu w0.2: v2(83.185,28.503) v1(99.949,28.503) 99.949,29.9 100.711,30.662 v1(101.981,30.662) ; v1(136.398,24.693) 140.081,28.376 v1(140.081,30.535) 145.415,25.201 v1(145.415,25.074)
  B.Cu w0.25: v1(72.009,64.317) 70.357,62.666 70.357,39.044 70.738,38.663 76.073,38.663 78.867,35.869 78.867,33.964 83.185,29.646 v2(83.185,28.503)
  B.Cu w0.75: 123.137,10.395 v2(123.137,11.993) ; v2@123.171,11.96 v2(123.137,11.993) ; 124.171,10.377 124.171,10.96 v2(123.137,11.993)
  B.Cu w1: v2(81.915,22.788) 81.915,18.978 82.3,18.594 122.305,18.594 123.19,17.708 123.19,14.638 123.137,14.586 v2(123.137,11.993)
+5V: C3.2 C14.2 J2.1 J2.3 J2.5 J2.7 J2.9 J3.18 L1.1 L1.2 R3.1 | length 160.9
  F.Cu w0.2: J2.1 150.183,36.447 151.511,37.774 v1(152.654,37.774) ; v1(165.1,37.139) 165.354,36.885 v1(165.354,35.234) ; v1(168.021,27.741) R3.1
  F.Cu w0.25: 74.883,33.748 74.883,51.118 77.224,53.458 J3.18
  F.Cu w1: L1.2 75.057,21.772 77.898,24.613 74.883,27.628 74.883,33.748 75.023,33.888 79.923,33.888 84.308,29.503 145.559,29.503 150.183,34.128 J2.1 ; L1.1 80.728,21.137 87.122,21.137 87.135,21.124 88.646,21.124 88.659,21.137 90.567,21.137
  B.Cu w0.2: v1(152.654,37.774) 153.289,37.774 154.178,38.663 163.576,38.663 v1(165.1,37.139) ; v1(165.354,35.234) 165.354,28.503 166.116,27.741 v1(168.021,27.741)
+12V: D1.2 D7.2 J1.A2 J1.A3 J1.B1 J1.B2 J1.B3 J2.E1 J2.E2 J4.1 J4.2 J4.3 | length 335.9
  F.Cu w0.75: J1.B1 115.171,11.727 116.84,13.396 ; J1.B2 116.171,12.595 v2(116.205,12.628) 117.171,11.662 J1.B3
  F.Cu w1: v1(71.12,86.796) 71.739,86.177 D7.2 ; D1.2 117.332,17.851 118.427,16.756 ; J4.3 J4.3@167.655,88.033
  F.Cu w3: J2.E1 J2.E1@159.319,34.788 ; 166.619,84.492 166.619,87.027 J4.3 J4.2 J4.1
  F.Cu w4: 116.84,13.396 116.84,15.168 118.427,16.756 123.785,22.113 139.267,22.113 140.076,21.304 155.51,21.304 158.933,24.728 J2.E1 v2(166.619,42.473) 166.619,71.932 166.619,84.492
  B.Cu w0.5: J1.A2 116.171,10.436 ; J1.A3 117.171,10.42
  B.Cu w0.75: v2(115.57,11.926) 116.171,11.325 116.171,10.436 ; v2(116.205,12.628) 117.171,11.662 117.171,10.42
  B.Cu w1: v1(71.12,86.796) 71.12,97.718 73.66,100.258 151.003,100.258 151.892,100.258 152.527,100.258 153.162,99.623 153.797,98.988 153.797,98.861 153.797,90.86 161.925,82.732 161.925,79.557 167.005,74.477 167.005,72.318
  B.Cu w3: 166.619,84.492 166.619,87.027 J4.3 J4.1
  B.Cu w4: v2(166.619,42.473) v2(166.619,43.357) v2(166.619,44.246) v2(166.619,45.135) v2(166.619,46.024) v2(166.619,46.913) v2(166.619,47.802) 166.619,71.932 166.619,84.492
CEC: J2.29 J3.13 | length 81.2
  F.Cu w0.2: J3.13 80.632,50.958 81.037,51.363 v1(81.28,51.363) ; J2.29 144.183,36.162 v1(144.78,36.758)
  B.Cu w0.2: v1(81.28,51.363) 136.525,51.363 140.335,47.553 140.335,36.758 140.97,36.123 144.145,36.123 v1(144.78,36.758)
CK_N: J2.176 J3.12 | length 50.1
  F.Cu w0.2: J3.12 78.911,50.474 v1(82.677,50.474) ; J2.176 107.433,27.713 107.408,27.738 107.408,28.063 v1(107.608,28.263)
  B.Cu w0.2: v1(82.677,50.474) 82.833,50.318 85.5,50.318 85.95,50.318 ; 85.725,50.318 85.95,50.318 ; v1(107.608,28.263) 107.408,28.463 107.408,45.873 102.963,50.318 85.95,50.318
CK_P: J2.178 J3.10 | length 49
  F.Cu w0.2: J3.10 83.15,49.458 v1(83.41,49.718) ; v1(106.758,28.263) 106.958,28.063 106.958,27.738 106.933,27.713 J2.178
  B.Cu w0.2: v1(83.41,49.718) 102.927,49.718 106.758,45.887 v1(106.758,28.263)
D0_N: J2.200 J3.9 | length 51.3
  F.Cu w0.2: J3.9 80.845,48.958 81.12,48.683 84.89,48.683 v1(85.09,48.883) ; J2.200 101.483,26.588 101.483,27.578 101.543,27.638 104.969,27.638 v1(105.835,28.503)
  B.Cu w0.2: v1(85.09,48.883) 85.29,48.683 102.693,48.683 105.635,45.742 105.635,28.703 v1(105.835,28.503)
D0_P: J2.202 J3.7 | length 50.4
  F.Cu w0.2: J3.7 80.845,47.958 81.12,48.233 84.89,48.233 v1(85.09,48.033) ; J2.202 100.983,26.638 100.983,27.714 101.357,28.088 104.783,28.088 104.985,28.29 v1(104.985,28.503)
  B.Cu w0.2: v1(85.09,48.033) 85.29,48.233 102.507,48.233 105.185,45.555 105.185,28.703 v1(104.985,28.503)
D1_N: J2.194 J3.6 | length 46.3
  F.Cu w0.2: J3.6 80.845,47.458 81.12,47.183 83.873,47.183 84.473,46.584 v1(84.756,46.584) ; J2.194 102.933,25.988 102.908,25.963 102.908,25.466 v1(103.462,24.913)
  B.Cu w0.2: v1(84.756,46.584) 99.713,46.584 103.115,43.182 103.115,25.26 v1(103.462,24.913)
D1_P: J2.196 J3.4 | length 45.4
  F.Cu w0.2: J3.4 80.845,46.458 81.12,46.733 83.687,46.733 84.154,46.266 v1(84.154,45.983) ; J2.196 102.433,25.988 102.458,25.963 102.458,25.28 102.612,25.126 v1(102.612,24.913)
  B.Cu w0.2: v1(84.154,45.983) 99.677,45.983 102.612,43.048 v1(102.612,24.913)
D2_N: J2.188 J3.3 | length 46
  F.Cu w0.2: J3.3 80.845,45.958 81.12,45.683 82.833,45.683 83.913,44.603 84.255,44.603 v1(84.455,44.803) ; v1(101.39,32.948) 101.39,32.735 102.221,31.903 103.705,31.903 v1(104.565,31.043) ; J2.188@104.408,26.563 J2.188 104.433,25.988 104.408,25.963 104.408,25.783 104.978,25.213 v1(105.261,25.213)
  B.Cu w0.2: v1(84.455,44.803) 84.655,44.603 99.153,44.603 101.19,42.567 101.19,33.148 v1(101.39,32.948) ; v1(104.565,31.043) 104.365,30.843 104.365,25.826 104.978,25.213 v1(105.261,25.213)
D2_P: J2.190 J3.1 | length 46
  F.Cu w0.2: J3.1 80.845,44.958 81.12,45.233 82.647,45.233 83.727,44.153 84.255,44.153 v1(84.455,43.953) ; v1(100.54,32.948) 101.072,32.417 102.035,31.453 103.519,31.453 103.715,31.257 v1(103.715,31.043) ; J2.190@103.958,26.563 J2.190 103.933,25.392 v1(104.667,24.658)
  B.Cu w0.2: v1(84.455,43.953) 84.655,44.153 98.967,44.153 100.74,42.38 100.74,33.148 v1(100.54,32.948) ; v1(103.715,31.043) 103.715,25.61 v1(104.667,24.658)
DP_A_HPD: J2.276
DP_D_AUX: J2.232
DP_D_AUX#: J2.230
DP_D_HPD: J2.236
DP_D_L3: J2.208 J2.214 J2.220 J2.226
DP_D_L3#: J2.206 J2.212 J2.218 J2.224
Enable: C16.1 D3.2 J2.8 R1.2 R3.2 | length 44.1
  F.Cu w0.2: J2.8 149.433,27.95 v1(149.479,27.995) ; v1(167.005,36.504) 167.005,33.71 167.908,32.807 R3.2
  F.Cu w0.25: C16.1 163.068,25.455 v1(163.576,25.455) ; v1(166.497,26.979) 167.108,27.591 167.108,33.607 167.005,33.71 ; D3.2 167.4,36.109 v1(167.005,36.504) 167.005,38.395 R1.2
  B.Cu w0.2: v1(149.479,27.995) 153.035,31.551 161.671,31.551 162.433,32.313 162.433,33.583 165.354,36.504 v1(167.005,36.504)
  B.Cu w0.25: v1(163.576,25.455) 164.973,25.455 v1(166.497,26.979)
GND: C1.2 C2.2 C3.1 C14.1 C16.2 D3.1 J1.A4 J1.A12 J1.A15 J1.A18 J1.B4 J1.B7 J1.B13 J1.B16 J1.B18 J2.11 J2.13 J2.15 J2.17 J2.36 J2.37 J2.46 J2.47 J2.52 J2.53 J2.58 J2.59 J2.64 J2.65 J2.70 J2.71 J2.76 J2.77 J2.82 J2.83 J2.88 J2.89 J2.94 J2.95 J2.100 J2.101 J2.106 J2.107 J2.112 J2.113 J2.118 J2.119 J2.124 J2.125 J2.133 J2.134 J2.139 J2.140 J2.145 J2.146 J2.151 J2.152 J2.157 J2.166 J2.173 J2.174 J2.179 J2.180 J2.185 J2.186 J2.191 J2.192 J2.197 J2.198 J2.203 J2.204 J2.209 J2.210 J2.215 J2.216 J2.221 J2.222 J2.228 J2.244 J2.250 J2.251 J2.256 J2.257 J2.262 J2.263 J2.268 J2.269 J2.275 J2.E3 J2.E4 J2.MP J3.2 J3.5 J3.8 J3.11 J3.17 J3.MH1 J3.MH2 J3.MH3 J3.MH4 J4.4 J4.5 J4.6 J6.1 MH1.1 MH2.1 MH3.1 MH4.1 R1.1 R6.1 R11.1 SW1.2 SW1.Un1 SW1.Un2 SW2.2 SW2.Un1 SW2.Un2 U1.1 | length 206.8
  F.Cu w0.25: 76.835,48.823 77.2,48.458 J3.8 ; J3.2 77.345,45.458 76.835,45.968 76.835,46.283 ; J3.5 77.345,46.958 76.835,46.448 76.835,46.283 ; J3.11 77.345,49.958 76.835,49.448 ; J3.17 78.87,52.933 77.335,52.933 76.835,52.433 76.835,49.448 ; J2.275 82.683,36.117 ; J2.269 84.183,36.106 ; J2.263 85.683,36.082 ; J2.257 87.183,36.062 ; J2.251 88.683,36.086 ; J2.221 96.183,36.079 ; J2.215 97.683,36.103 ; 99.06,36.123 99.183,36 J2.209 ; 100.584,36.123 100.683,36.024 J2.203 ; J2.197 102.183,36.048 ; J2.191 103.683,36.048 ; 105.029,36.123 105.183,35.969 J2.185 ; J2.179 106.683,36.12 ; J2.173 108.183,36.103 ; J2.157 112.183,36.081 ; J2.151 113.683,36.105 ; J2.146 114.933,27.588 115.214,27.868 116.459,27.868 ; J2.145 115.183,36.118 ; J2.140 116.433,27.843 116.459,27.868 ; J2.134 117.933,27.692 118.11,27.868 ; 118.745,27.868 118.11,27.868 ; 119.761,27.741 119.888,27.868 120.777,27.868 ; J2.124 120.433,27.525 120.777,27.868 ; J2.119 121.683,36.106 ; J2.118 121.933,27.501 122.301,27.868 ; J2.113 123.183,36.117 ; J2.112 123.433,27.477 123.825,27.868 ; J2.107 124.683,36.093 ; J2.106 124.933,27.588 125.214,27.868 125.476,27.868 ; J2.101 126.183,36.069 ; J2.100 126.433,27.556 126.746,27.868 ; J2.95 127.683,36.045 ; J2.94 127.933,27.588 128.143,27.797 128.143,27.868 ; J2.89 129.183,36.021 ; J2.88 129.433,27.508 129.794,27.868 ; J2.83 130.683,36.123 ; J2.82 130.933,27.738 131.064,27.868 ; J2.77 132.183,36.1 ; J2.76 132.433,27.587 132.715,27.868 ; J2.71 133.683,36.076 ; J2.70 133.933,27.69 134.112,27.868 ; J2.65 135.183,36.068 ; J2.64 135.433,27.666 135.636,27.868 ; J2.59 136.683,36.092 ; J2.58 136.933,27.714 136.779,27.868 ; J2.53 138.183,36.116 ; J2.52 138.433,27.573 138.138,27.868 ; J2.47 139.683,36.107 ; J2.46 139.933,27.588 139.653,27.868 ; J2.36 142.433,27.588 142.153,27.868 139.653,27.868 ; 76.835,46.283 76.835,49.448 ; 116.459,27.868 118.11,27.868 ; 120.777,27.868 122.301,27.868 ; 122.301,27.868 123.825,27.868 ; 123.825,27.868 125.476,27.868 ; 125.476,27.868 126.746,27.868 ; 126.746,27.868 128.143,27.868 ; 128.143,27.868 129.794,27.868 ; 129.794,27.868 131.064,27.868 ; 131.064,27.868 132.715,27.868 ; 132.715,27.868 134.112,27.868 ; 134.112,27.868 135.636,27.868 ; 135.636,27.868 136.779,27.868 ; 136.779,27.868 138.138,27.868 ; 138.138,27.868 139.653,27.868
  F.Cu w0.5: 70.485,29.265 71.632,28.118 SW1.Un1 ; 70.485,35.361 71.442,36.318 SW1.Un2
  F.Cu w0.75: J1.B4 v1(118.171,11.027) ; v1(120.65,11.993) 121.171,11.472 J1.B7 ; v1(128.27,11.231) 128.967,11.231 129.171,11.027 J1.B13 ; v1(131.445,13.263) 132.756,11.952 132.756,11.612 ; J1.B16 132.171,11.027 132.756,11.612 ; J1.B18 134.171,10.662 133.221,11.612 132.756,11.612
  F.Cu w1: 161.163,85.78 163.431,88.048 J4.6 163.44,88.075 161.163,90.352 163.059,92.248 J4.5 ; 164.973,94.915 J4.4 165.218,98.226 165.735,98.226 ; 165.082,90.606 J4.5 ; 165.227,94.035 J4.5
  F.Cu w3: J2.MP@77.233,30.688 77.233,28.613 78.74,27.106 ; 163.449,33.202 165.133,31.518 J2.MP@165.133,30.688
  F.Cu w4: J2.E4 J2.E4@153.683,27.247 ; v1@153.933,33.466 v1(153.933,33.593) J2.E3 153.933,35.244 154.333,35.644
  B.Cu w0.5: 70.358,35.107 71.569,36.318 SW1.Un2 ; J1.A4 118.171,10.535 ; v1(119.126,31.17) 131.445,18.851 v1(131.445,13.263) ; J1.A12 128.171,11.133 v1(128.27,11.231)
  B.Cu w0.75: 118.171,10.535 v1(118.171,11.027) 119.137,11.993 v1(120.65,11.993) ; J1.A15 131.171,12.99 v1(131.445,13.263) ; v1(133.92,10.913) 134.171,10.662 J1.A18
  other v1: 83.312,10.342 83.312,11.104 83.312,11.866 83.312,12.628 83.312,13.39 83.312,14.152 83.312,14.914 83.312,15.676 83.312,16.438 83.312,17.2 114.935,17.2 96.266,32.821 97.663,32.821 99.187,32.821 121.666,33.075 123.19,33.075 124.714,33.075 126.238,33.075 127.635,33.075 129.159,33.075 130.683,33.075 132.207,33.075 133.731,33.075 156.21,33.075 156.464,36.758 157.226,37.012 156.591,37.52 155.702,37.647 157.861,37.647 166.243,38.282 168.656,40.568 162.814,100.893 163.576,100.893 164.338,100.893 165.1,100.893 165.862,100.893 166.624,100.893 167.386,100.893 168.148,100.893
Net-(C1-Pad1): C1.1 C2.1 D1.1 U1.3 | length 7
  F.Cu w1: U1.3 110.502,22.802 C2.1 112.89,21.925 C1.1 114.557,21.912 D1.1
Net-(C4-Pad1): J2.279
Net-(C5-Pad1): J2.277
Net-(C6-Pad1): J2.273
Net-(C7-Pad1): J2.271
Net-(C8-Pad1): J2.267
Net-(C9-Pad1): J2.265
Net-(C10-Pad1): J2.261
Net-(C11-Pad1): J2.259
Net-(C12-Pad1): J2.255
Net-(C13-Pad1): J2.253
Net-(C14-Pad2): D5.1
Net-(D5-Pad2): D5.2 U1.2 | length 16.6
  F.Cu w0.25: U1.2@102.768,20.502 U1.2@109.068,20.502
  F.Cu w1: D5.2 102.453,20.187 U1.2@102.768,20.502
Net-(D7-Pad1): D7.1 J6.2 | length 8.1
  F.Cu w1: D7.1 73.48,88.23 73.48,94.694 73.869,95.083 J6.2
Net-(FB1-Pad1): J2.164
Net-(FB2-Pad1): J2.162
Net-(FB3-Pad1): J2.172
Net-(FB4-Pad1): J2.170
Net-(FB5-Pad2): J2.168 R11.2 R12.1 | length 16
  F.Cu w0.2: R12.1 97.141,23.056 97.536,22.661 100.584,22.661 100.76,22.838 R11.2 107.654,23.868 109.423,25.638 109.433,25.638 J2.168
Net-(J1-PadA1): J1.A1 J1.B17
Net-(J1-PadA5): J1.A5
Net-(J1-PadA6): J1.A6
Net-(J1-PadA7): J1.A7
Net-(J1-PadA8): J1.A8
Net-(J1-PadB9): J1.B9
Net-(J1-PadB12): J1.B12
Net-(J2-Pad6): J2.6
Net-(J2-Pad10): J2.10
Net-(J2-Pad12): J2.12
Net-(J2-Pad14): J2.14
Net-(J2-Pad16): J2.16
Net-(J2-Pad18): J2.18
Net-(J2-Pad19): J2.19
Net-(J2-Pad22): J2.22
Net-(J2-Pad23): J2.23
Net-(J2-Pad25): J2.25
Net-(J2-Pad26): J2.26
Net-(J2-Pad27): J2.27
Net-(J2-Pad28): J2.28
Net-(J2-Pad30): J2.30
Net-(J2-Pad38): J2.38
Net-(J2-Pad39): J2.39
Net-(J2-Pad40): J2.40
Net-(J2-Pad41): J2.41
Net-(J2-Pad42): J2.42
Net-(J2-Pad43): J2.43
Net-(J2-Pad44): J2.44
Net-(J2-Pad45): J2.45
Net-(J2-Pad154): J2.154
Net-(J2-Pad158): J2.158
Net-(J2-Pad159): J2.159
Net-(J2-Pad160): J2.160
Net-(J2-Pad161): J2.161
Net-(J2-Pad163): J2.163
Net-(J2-Pad165): J2.165
Net-(J2-Pad167): J2.167
Net-(J2-Pad169): J2.169
Net-(J2-Pad171): J2.171
Net-(J2-Pad175): J2.175
Net-(J2-Pad177): J2.177
Net-(J2-Pad181): J2.181
Net-(J2-Pad182): J2.182
Net-(J2-Pad183): J2.183
Net-(J2-Pad184): J2.184
Net-(J2-Pad187): J2.187
Net-(J2-Pad189): J2.189
Net-(J2-Pad193): J2.193
Net-(J2-Pad195): J2.195
Net-(J2-Pad199): J2.199
Net-(J2-Pad201): J2.201
Net-(J2-Pad205): J2.205
Net-(J2-Pad207): J2.207
Net-(J2-Pad211): J2.211
Net-(J2-Pad213): J2.213
Net-(J2-Pad217): J2.217
Net-(J2-Pad219): J2.219
Net-(J2-Pad223): J2.223
Net-(J2-Pad225): J2.225
Net-(J2-Pad227): J2.227
Net-(J2-Pad229): J2.229
Net-(J2-Pad231): J2.231
Net-(J2-Pad233): J2.233
Net-(J2-Pad234): J2.234
Net-(J2-Pad235): J2.235
Net-(J2-Pad237): J2.237
Net-(J2-Pad238): J2.238
Net-(J2-Pad239): J2.239
Net-(J2-Pad240): J2.240
Net-(J2-Pad241): J2.241
Net-(J2-Pad242): J2.242
Net-(J2-Pad243): J2.243
Net-(J2-Pad245): J2.245
Net-(J2-Pad246): J2.246
Net-(J2-Pad247): J2.247
Net-(J2-Pad248): J2.248
Net-(J2-Pad249): J2.249
Net-(J2-Pad252): J2.252
Net-(J2-Pad254): J2.254
Net-(J2-Pad258): J2.258
Net-(J2-Pad260): J2.260
Net-(J2-Pad264): J2.264
Net-(J2-Pad266): J2.266
Net-(J2-Pad270): J2.270
Net-(J2-Pad272): J2.272
Net-(J2-Pad274): J2.274
Net-(J2-Pad281): J2.281
Net-(J3-Pad14): J3.14
PER0_N: J1.A17 J2.147 | length 36.2
  F.Cu w0.2: J2.147 114.683,33.892 v1(115.916,32.659)
  B.Cu w0.2: v1(115.916,32.659) 119.091,32.659 133.171,18.579 J1.A17
PER0_P: J1.A16 J2.149 | length 36.3
  F.Cu w0.2: J2.149 114.183,33.261 v1(115.35,32.094)
  B.Cu w0.2: v1(115.35,32.094) 115.65,31.794 119.39,31.794 132.171,19.013 J1.A16
PER1_N: J2.141
PER1_P: J2.143
PER2_N: J2.135
PER2_P: J2.137
PER3_N: J2.121
PER3_P: J2.123
PER4_N: J2.115
PER4_P: J2.117
PER5_N: J2.109
PER5_P: J2.111
PER6_N: J2.103
PER6_P: J2.105
PER7_N: J2.97
PER7_P: J2.99
PER8_N: J2.91
PER8_P: J2.93
PER9_N: J2.85
PER9_P: J2.87
PER10_N: J2.79
PER10_P: J2.81
PER11_N: J2.73
PER11_P: J2.75
PER12_N: J2.67
PER12_P: J2.69
PER13_N: J2.61
PER13_P: J2.63
PER14_N: J2.55
PER14_P: J2.57
PER15_N: J2.49
PER15_P: J2.51
PERST: J1.A11 J2.156 Q1.2 | length 92.2
  F.Cu w0.2: v1(113.03,24.693) 112.395,25.328 112.395,26.549 J2.156 112.433,27.538 113.445,28.549 144.099,28.549 v1(144.399,28.249) ; v1(150.876,31.043) 155.321,31.043 v1(156.21,30.154) ; v1(161.544,30.789) 162.24,30.789 163.033,29.996 163.033,28.85 162.814,28.63 v1(162.814,28.122) ; Q1.2 164.719,21.976 v1(164.719,23.169)
  B.Cu w0.2: v1(113.03,24.693) 114.935,22.788 123.825,22.788 125.171,21.442 J1.A11 ; v1(144.399,28.249) 148.209,28.249 150.876,30.916 v1(150.876,31.043) ; v1(156.21,30.154) 156.845,30.789 v1(161.544,30.789) ; v1(162.814,28.122) 162.814,25.074 v1(164.719,23.169)
PET0_N: J1.B15 J2.148 | length 32.5
  F.Cu w0.2: J2.148 114.433,25.463 114.408,25.438 114.408,25.431 115.356,24.483 v1(115.57,24.483) ; v1(128.571,14.834) 128.571,14.551 130.896,12.225 130.896,11.627 131.171,11.352 J1.B15 131.171,9.927 J1.B15@130.896,10.202
  B.Cu w0.2: v1(115.57,24.483) 115.77,24.283 123.918,24.283 128.419,19.782 128.419,14.985 v1(128.571,14.834)
PET0_P: J1.B14 J2.150 | length 32.8
  F.Cu w0.2: J2.150 113.933,25.463 113.958,25.438 113.958,25.245 v1(115.57,23.633) ; v1(127.969,14.233) 128.252,14.233 130.446,12.039 130.446,11.627 130.171,11.352 J1.B14 130.171,9.927 J1.B14@130.446,10.202
  B.Cu w0.2: v1(115.57,23.633) 115.77,23.833 123.732,23.833 127.969,19.596 v1(127.969,14.233)
PET1_N: J2.142
PET1_P: J2.144
PET2_N: J2.136
PET2_P: J2.138
PET3_N: J2.120
PET3_P: J2.122
PET4_N: J2.114
PET4_P: J2.116
PET5_N: J2.108
PET5_P: J2.110
PET6_N: J2.102
PET6_P: J2.104
PET7_N: J2.96
PET7_P: J2.98
PET8_N: J2.90
PET8_P: J2.92
PET9_N: J2.84
PET9_P: J2.86
PET10_N: J2.78
PET10_P: J2.80
PET11_N: J2.72
PET11_P: J2.74
PET12_N: J2.66
PET12_P: J2.68
PET13_N: J2.60
PET13_P: J2.62
PET14_N: J2.54
PET14_P: J2.56
PET15_N: J2.48
PET15_P: J2.50
PRSNT_R#: J2.2 R15.1 | length 22.7
  F.Cu w0.2: J2.2 150.933,28.053 v1(151.13,28.249) ; v1(161.671,28.122) 162.56,27.233 165.1,27.233 167.993,24.34 R15.1
  B.Cu w0.2: v1(151.13,28.249) 151.384,28.503 161.29,28.503 v1(161.671,28.122)
REFCLK_N: J1.A14 J2.153 | length 35.5
  F.Cu w0.2: J2.153 113.183,33.129 v1(114.789,31.524)
  B.Cu w0.2: v1(114.789,31.524) 115.089,31.224 118.184,31.224 130.171,19.237 J1.A14
REFCLK_P: J1.A13 J2.155 | length 35.6
  F.Cu w0.2: J2.155 112.683,32.502 v1(114.177,31.008)
  B.Cu w0.2: v1(114.177,31.008) 114.477,30.708 118.127,30.708 129.171,19.664 J1.A13
SMCLK: J1.B5 J2.34 R16.2 | length 36.2
  F.Cu w0.2: J1.B5 119.171,12.497 126.287,19.613 v1(134.62,19.613) ; R16.2 140.316,24.317 v1(141.286,24.317) 141.586,24.617 141.913,24.617 142.933,25.638 J2.34
  B.Cu w0.2: v1(134.62,19.613) 136.582,19.613 v1(141.286,24.317)
SMDAT: J1.B6 J2.32 R20.1 | length 35.9
  F.Cu w0.2: J1.B6 119.975,8.323 119.975,12.735 126.053,18.813 v1(134.62,18.813) ; v1(141.986,23.804) 142.494,24.312 ; J2.32 143.433,25.252 142.494,24.312 ; R20.1 142.748,24.058 142.494,24.312
  B.Cu w0.2: v1(134.62,18.813) 136.995,18.813 v1(141.986,23.804)
TH_OVERT#: J2.20 Q1.1 R17.1 | length 26.1
  F.Cu w0.2: v1(146.431,25.074) 146.433,25.077 J2.20 ; Q1.1 164.769,19.994 v1(165.989,19.994) 165.989,18.992 R17.1
  B.Cu w0.2: v1(146.431,25.074) 146.685,25.328 150.622,25.328 155.956,19.994 v1(165.989,19.994)
TH_PWM: J2.24 J6.4 | length 138.7
  F.Cu w0.2: J6.4@74.93,90.733 J6.4 J6.4@75.28,90.733 ; J2.24 145.433,27.538 150.844,32.948 v1(151.13,32.948)
  B.Cu w0.2: J6.4 75.28,90.733 142.24,90.733 151.13,81.843 v1(151.13,32.948)
TMDS_HPD: J2.31 J3.19 R6.2 | length 96.8
  F.Cu w0.2: R6.2 73.787,59.11 75.057,57.84 75.057,55.3 76.399,53.958 J3.19 v1(80.7,53.958) ; v1(143.51,38.028) 143.683,37.855 J2.31
  B.Cu w0.2: v1(80.7,53.958) 141.55,53.958 145.415,50.093 145.415,38.028 v1(143.51,38.028)
TMDS_SCL: J2.35 J3.15 R18.1 | length 106.1
  F.Cu w0.2: R18.1 72.688,65.021 72.688,59.066 74.295,57.459 74.295,54.284 72.009,51.998 v1(71.12,51.998) ; J3.15 80.623,51.958 v1(80.683,51.898) ; v1(141.605,37.393) 142.683,36.315 J2.35
  B.Cu w0.2: v1(71.12,51.998) 71.221,51.898 v1(80.683,51.898) 80.983,52.198 137.596,52.198 141.605,48.188 v1(141.605,37.393)
TMDS_SDA: J2.33 J3.16 R14.2 | length 98.7
  F.Cu w0.2: R14.2 70.382,61.308 70.382,53.536 v1(71.12,52.798) ; J3.16 80.47,52.458 v1(80.81,52.798) ; v1(142.24,38.028) 143.183,37.085 J2.33
  B.Cu w0.2: v1(71.12,52.798) v1(80.81,52.798) 138.265,52.798 142.24,48.823 v1(142.24,38.028)
VGA_DISABLE#: J2.21 SW2.1 | length 126.2
  F.Cu w0.2: J2.21 146.183,36.13 v1(147.32,37.266)
  B.Cu w0.2: SW2.1 149.003,80.668 150.495,79.176 150.495,38.282 149.479,37.266 v1(147.32,37.266)
WAKE: J1.B11 J2.4 | length 42.3
  F.Cu w0.2: J1.B11 125.171,15.733 127.482,18.043 150.195,18.043 v1(150.495,18.343) ; J2.4 150.433,24.668 v1(150.452,24.65)
  B.Cu w0.2: v1(150.452,24.65) 150.495,24.607 v1(150.495,18.343)
pads on no net: D1.Un1 D5.Un1 D7.Un1 J2.Un1 J2.Un2 J4.MH1 J4.MH2 J6.3 R12.2 SW1.1 SW1.3 SW2.3
copper on no net: | length 32.1
  F.Cu w0.2: v1(93.828,24.058) 94.031,23.855 95.391,23.855
  B.Cu w0.2: 72.39,34.218 73.66,34.218 74.93,32.948 74.93,24.693 75.565,24.058 v1(93.828,24.058)

## Polygon pours and split planes (outlines as drawn)
GND on F.Cu "F.Cu-GND" (solid, remove dead copper, pour order 1): 84.3,9.398 84.328,17.526 102.968,17.526 102.997,12.7 110.617,12.7 170.123,17.017 169.799,102.671 68.834,102.925 69.723,9.398
GND on B.Cu "B.Cu-GND" (solid, remove dead copper, pour order 0): 170.18,1.96 69.469,1.579 68.834,102.925 169.799,102.671

## Keep-outs
Edge.Cuts:
  lines w0.1: 69.52,9.178 84.52,9.178 ; 69.52,9.178 69.52,102.328 ; 69.52,9.178 84.52,9.178 ; 69.52,9.178 69.52,102.328 ; 69.52,102.328 169.52,102.328 ; 69.52,102.328 169.52,102.328 ; 84.52,9.178 84.52,17.428 ; 84.52,9.178 84.52,17.428 ; 84.52,17.428 102.87,17.428 ; 84.52,17.428 102.87,17.428 ; 102.87,9.178 110.87,9.178 ; 102.87,9.178 102.87,17.428 ; 102.87,9.178 110.87,9.178 ; 102.87,9.178 102.87,17.428 ; 110.87,9.178 110.87,15.603 ; 110.87,9.178 110.87,15.603 ; 110.87,15.603 cw(c112.695,15.603) 114.52,15.603 ; 110.87,15.603 cw(c112.695,15.603) 114.52,15.603 ; 114.52,15.603 114.521,13.077 ; 114.52,15.603 114.521,13.077 ; 114.521,5.177 115.021,4.677 ; 114.521,5.177 114.521,13.077 ; 114.521,5.177 115.021,4.677 ; 114.521,5.177 114.521,13.077 ; 115.021,4.677 125.221,4.677 ; 115.021,4.677 125.221,4.677 ; 125.221,4.677 125.721,5.177 ; 125.221,4.677 125.721,5.177 ; 125.721,5.177 125.721,12.127 ; 125.721,5.177 125.721,12.127 ; 125.721,12.127 cw(c126.671,12.127) 127.621,12.127 ; 125.721,12.127 cw(c126.671,12.127) 127.621,12.127 ; 127.621,5.177 128.121,4.677 ; 127.621,5.177 127.621,12.127 ; 127.621,5.177 128.121,4.677 ; 127.621,5.177 127.621,12.127 ; 128.121,4.677 134.321,4.677 ; 128.121,4.677 134.321,4.677 ; 134.321,4.677 134.821,5.177 ; 134.321,4.677 134.821,5.177 ; 134.821,5.177 134.821,13.077 ; 134.821,5.177 134.821,13.077 ; 134.821,13.077 134.822,17.428 ; 134.821,13.077 134.822,17.428 ; 134.822,17.428 169.52,17.428 ; 134.822,17.428 169.52,17.428 ; 169.52,17.428 169.52,102.328 ; 169.52,17.428 169.52,102.328

## Silkscreen, mask and mechanical layers (free items; w line width, h text height)
F.SilkS:
  lines w0.12: 75.819,77.398 76.962,78.414 ; 80.162,29.596 80.162,99.596 ; 80.188,99.596 162.179,99.596 162.179,29.596
  text "FAN" at 78.771,93.413 h0.9 r90
  text "3D Only" at 76.819,80.086 h0.9 r90
  text "VGA" at 76.741,75.287 h0.9 r90
  text "Designed by Krutav Shah" at 104.336,74.708 h3.5
  text "Krutav.com" at 109.867,65.679 h5
  text "HDMI" at 73.485,58.701 h0.9
  text "Version 1.0" at 115.479,47.553 h2
  text "ON" at 71.925,38.377 h0.9
  text "VGA" at 70.772,37.949 h0.9 r90
  text "JLCJLCJLCJLC" at 119.229,30.09 h1
  text "OFF" at 71.741,25.677 h0.9
B.SilkS:
  text "Designed by Krutav Shah" at 136.964,74.708 h3.5
  text "Krutav.com" at 131.433,65.679 h5
  text "Version 1.0" at 124.043,47.553 h2
F.Mask:
  region: 134.874,4.627 114.49,4.627 114.49,10.215 134.874,10.215
  region: 110.871,9.136 102.87,9.136 102.87,12.628 110.871,12.628
B.Mask:
  region: 134.874,4.627 114.49,4.627 114.49,10.215 134.874,10.215
  region: 110.871,9.136 102.87,9.136 102.87,12.628 110.871,12.628
Dwgs.User:
  lines w0.12: 80.193,95.596 83.693,95.596 87.193,95.596 ; 155.179,95.596 158.679,95.596 162.179,95.596
  lines w0.15: 69.527,13.61 77.027,13.61 ; 77.013,13.678 84.513,13.678

## Dimensions
84.52,9.178 to 69.52,9.178 on Dwgs.User
169.52,102.328 to 69.52,102.328 on Dwgs.User
77.02,67.009 to 77.027,12.975 on Dwgs.User

## Text inside footprints (layer, text, board x,y; h text height)
J1: Cmts.User "PCB Thickness 1.57 mm" at 117.936,5.166 h0.5